# Altium PCB IridiumGpsAntenna.PcbDoc
Units mil, origin at the board's own origin, x right, y up, seen from the top; angles counter-clockwise.
Board outline 2555 x 1275 mil, 2 copper layers (Top Layer, Bottom Layer); 6 components, 11 nets, 41 pads, 340 vias.
Unrouted connection lines stored in the file: 1.
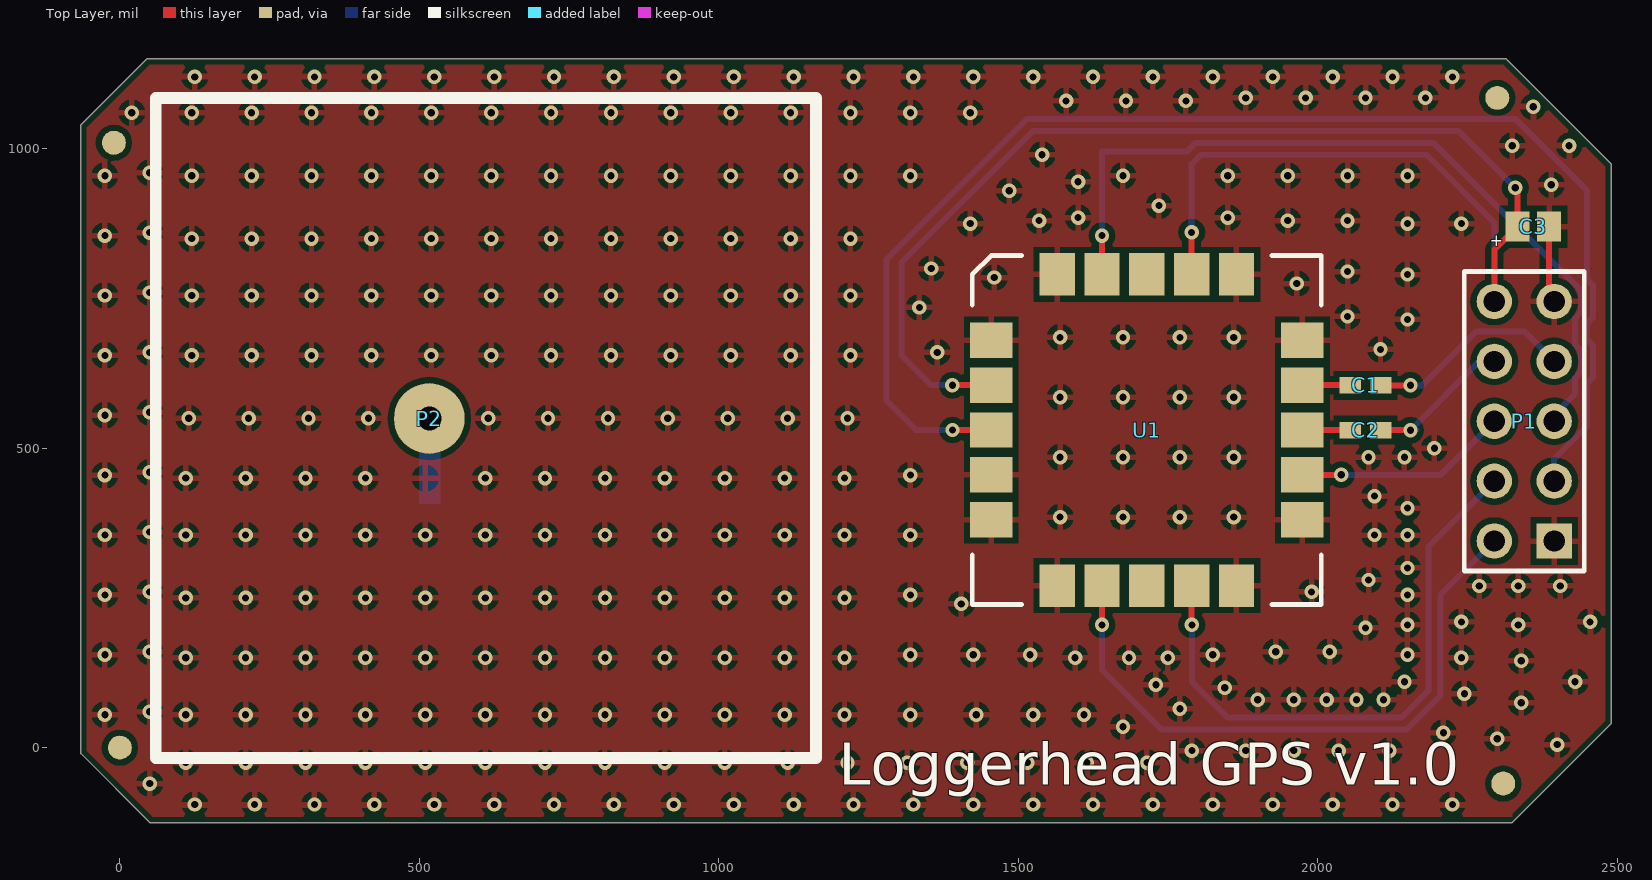
[diagram p0: Top Layer view]
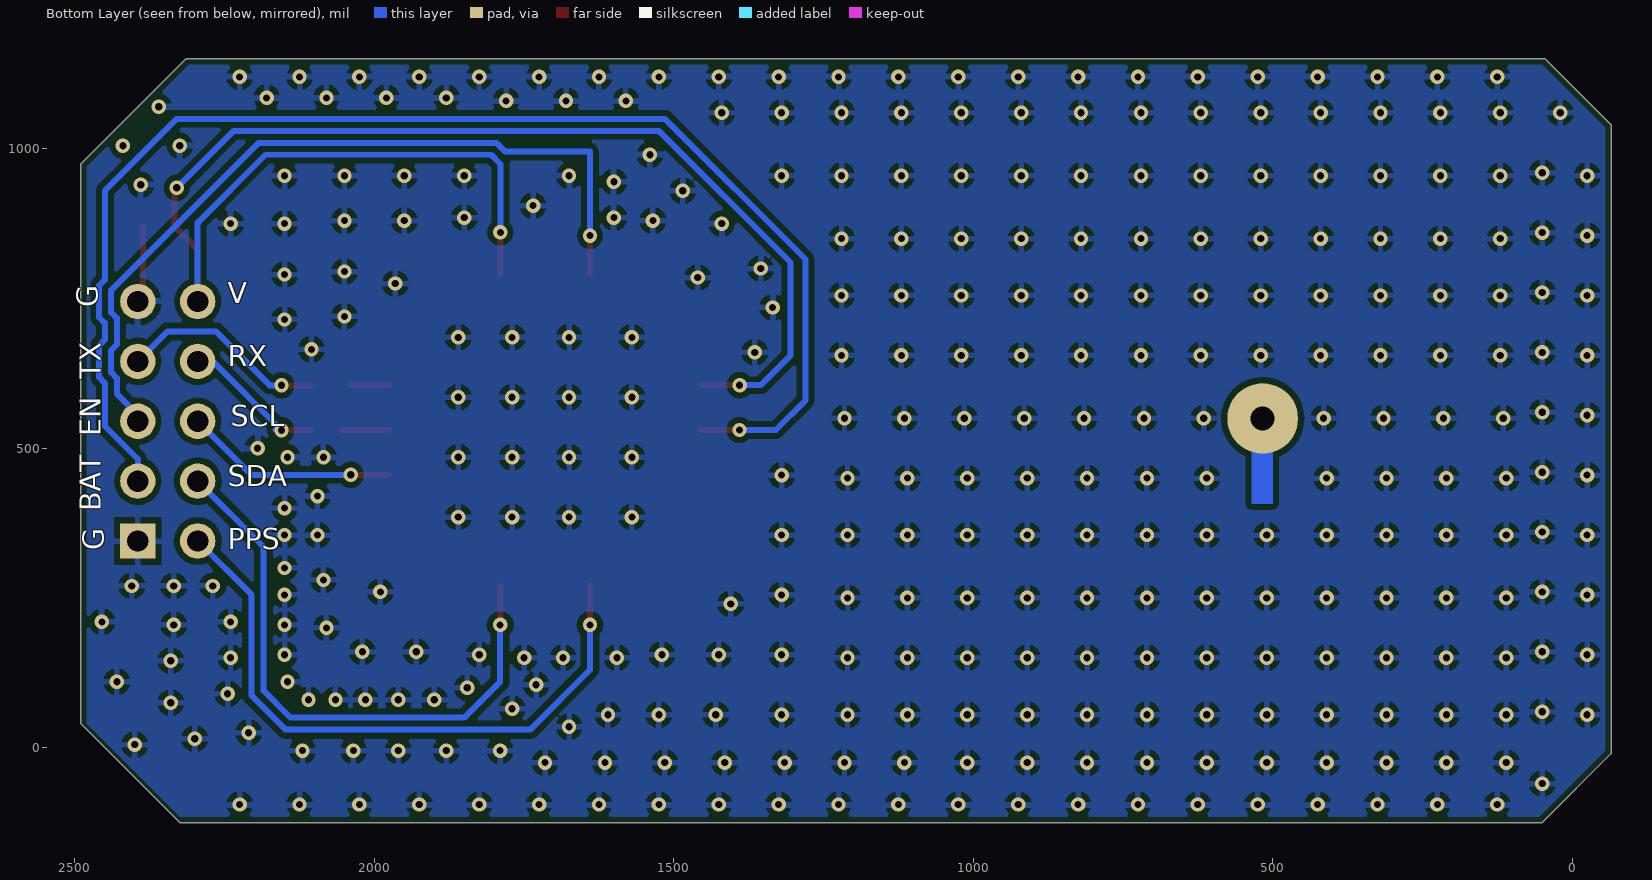
[diagram p1: Bottom Layer view, seen from below]

## Layer stack, top to bottom
Top Solder: solder mask 0.4, Solder Resist, Dk 3.5
Top Layer: signal copper 1.4
Dielectric 1: dielectric 12.6, FR-4, Dk 4.8
Bottom Layer: signal copper 1.4
Bottom Solder: solder mask 0.4, Solder Resist, Dk 3.5

## Board outline
-65,-10 -65,1040 45,1150 2315,1150 2490,975 2490,40 2325,-125 50,-125

## Design rules (kind name [scope] priority, off if disabled: settings)
Clearance [All] p1: gap=10
PolygonConnect [All] p1: connectstyle=Relief reliefconductorwidth=10 reliefentries=4 polygonreliefangle="90 Angle" airgapwidth=10
RoutingVias [All] p1: holewidth=12 width=24 viastyle="Through Hole" minholewidth=12 minwidth=24 maxholewidth=100 maxwidth=100
SolderMaskExpansion [All] p1: expansion=4
Width [All] p1: maxlimit=10 minlimit=10 preferedwidth=10
29 further rules are at their usual default settings.

## Components (designator, comment, footprint, x,y, rotation, side; value= is the part's Value field where it differs from the comment)
C1 "0402 Ferrite" 0402 2080,605 r0 top
C2 "0402 Ferrite" 0402 2080,530 r0 top
C3 "1uF" Tant0805 2360,870 r180 top
P1 "Header 5X2" HDR2X5 2395,345 r90 top
P2 "Iridium" "Iridium Antenna" 60,1085 r0 top
U1 "SAM-M8Q" "GPS SAM-MQ8" 1455,680 r0 top

## Footprints (in the part's own frame and the unit in brackets; to place one, negate y for a bottom-side part, rotate by r counter-clockwise, add the part's x,y. Pads: shape width x height; smd on the part's side, far side on the other; paste and mask are expansions set on the pad)
0402 [mm] "Chip Capacitor; Body 1.0 x 0.5 mm (LxW typ)"
  rect 0.9x0.7 smd: 1(-0.65,0) 2(0.65,0)
"GPS SAM-MQ8" [mm]
  rect 1.8x1.5 smd paste-0.25: 1(0,0) 2(0,-1.9) 3(0,-3.8) 4(0,-5.7) 5(0,-7.6) 11(13.2,-7.6) 12(13.2,-5.7) 13(13.2,-3.8) 14(13.2,-1.9) 15(13.2,0)
  rect 1.5x1.8 smd paste-0.25: 6(2.8,-10.4) 7(4.7,-10.4) 8(6.6,-10.4) 9(8.5,-10.4) 10(10.4,-10.4) 16(10.4,2.8) 17(8.5,2.8) 18(6.6,2.8) 19(4.7,2.8) 20(2.8,2.8)
  silkscreen extent -0.8,-11.2 14,3.6
HDR2X5 [mm] "Connector; Header; 5x2 Position"
  rect 1.5x1.5 hole 0.9: 1(0,0)
  round 1.5 hole 0.9: 2(0,2.54) 3(2.54,0) 4(2.54,2.54) 5(5.08,0) 6(5.08,2.54) 7(7.62,0) 8(7.62,2.54) 9(10.16,0) 10(10.16,2.54)
  silkscreen extent -1.27,-1.27 11.43,3.81
"Iridium Antenna" [mil] "Iridium patch antenna"
  round 118 hole 40 unplated: 0(456.69,-535.43)
  silkscreen extent 0,-1102 1102,0
Tant0805 [mil]
  rect 40x50 smd: 1(-26.5,0) 2(26.5,0)

## Part data
C1 C2: library part C0402, "Ceramic Chip Capacitor - Standard"
C3: library part Tant0805
P1: "Header, 5-Pin, Dual row"
P2: library part "Iridium Antenna"
U1: library part "GPS SAM-M8Q"

## Free pads (board coordinates)
  round 40 smd paste-20 mask+5: 0(-10,1010) 0(0,0) 0(2300,1085) 0(2310,-60)

## Via types
v1: diameter 24, hole 12, Top Layer to Bottom Layer, 340 vias

## Nets (pads, with @x,y where several pads share a name; then routed paths per layer and width w, separated by ;. In a path a pad name is that pad's centre, name@x,y a point inside that pad or via, vN(x,y) a via of type N, cw(c..) or ccw(c..) an arc to the next point about the centre after c; other vN are vias at no path point)
GND: C3.1 P1.1 P1.9 U1.1 U1.4 U1.5 U1.6 U1.10 U1.11 U1.15 U1.16 U1.20 | length 116.5
  Top Layer w10: P1.9@2386.5,753.5 C3.1
  other v1: 125,-95 225,-95 325,-95 425,-95 525,-95 625,-95 725,-95 825,-95 925,-95 1025,-95 1125,-95 1225,-95 1325,-95 1425,-95 1525,-95 1625,-95 1725,-95 1825,-95 1925,-95 2025,-95 2125,-95 2225,-95 50,-60 110,-25 210,-25 310,-25 410,-25 510,-25 610,-25 710,-25 810,-25 910,-25 1010,-25 1115,-25 1215,-25 1315,-25 1415,-25 1515,-25 1615,-25 1715,-25 1790,-5 1880,-5 1960,-5 2035,-5 2120,-5 2400,5 2300,15 2210,25 1675,35 -25,55 110,55 210,55 310,55 410,55 510,55 610,55 710,55 810,55 910,55 1010,55 1110,55 1210,55 1320,55 1430,55 1525,55 1610,55 50,60 1770,65 2340,75 1900,80 1960,80 2015,80 2065,80 2110,80 2245,90 1845,100 1730,105 2145,110 2430,110 2340,145 110,150 210,150 310,150 410,150 510,150 610,150 710,150 810,150 910,150 1010,150 1110,150 1210,150 1595,150 1685,150 1750,150 2240,150 -25,155 1320,155 1425,155 1520,155 1825,155 2150,155 50,160 1930,160 2020,160 2080,200 2150,205 2335,205 2240,210 2455,210 1405,240 110,250 210,250 310,250 410,250 510,250 610,250 710,250 810,250 910,250 1010,250 1110,250 1210,250 -25,255 1320,255 2150,255 50,260 1990,260 2270,270 2335,270 2405,270 2085,280 2150,300 -25,355 110,355 210,355 310,355 410,355 510,355 610,355 710,355 810,355 910,355 1010,355 1110,355 1210,355 1320,355 2095,355 2150,355 50,360 1570,385 1675,385 1770,385 1860,385 2150,400 2095,420 110,450 210,450 310,450 410,450 610,450 710,450 810,450 910,450 1010,450 1110,450 1210,450 -25,455 1320,455 50,460 1570,485 1675,485 1770,485 1860,485 2085,485 2145,485 2195,500 115,550 215,550 315,550 415,550 615,550 715,550 815,550 915,550 1015,550 1115,550 1215,550 -25,555 50,560 1570,585 1675,585 1770,585 1860,585 -25,655 120,655 220,655 320,655 420,655 520,655 620,655 720,655 820,655 920,655 1020,655 1120,655 1220,655 50,660 1365,660 2105,665 1570,685 1675,685 1770,685 1860,685 2150,715 2050,720 1335,735 -25,755 120,755 220,755 320,755 420,755 520,755 620,755 720,755 820,755 920,755 1020,755 1120,755 1220,755 50,760 1965,775 1460,785 2150,790 2050,795 1355,800 120,850 220,850 320,850 420,850 520,850 620,850 720,850 820,850 920,850 1020,850 1120,850 1220,850 -25,855 50,860 1420,875 2150,875 2240,875 1535,880 1950,880 2050,880 1600,885 1850,885 1735,905 1485,930 2390,940 1600,945 -25,955 120,955 220,955 320,955 420,955 520,955 620,955 720,955 820,955 920,955 1020,955 1120,955 1220,955 1320,955 1675,955 1850,955 1950,955 2050,955 2150,955 50,960 1540,990 2325,1005 2420,1005 20,1060 120,1060 220,1060 320,1060 420,1060 520,1060 620,1060 720,1060 820,1060 920,1060 1020,1060 1120,1060 1220,1060 1320,1060 1420,1060 2360,1070 1580,1080 1680,1080 1780,1080 1880,1085 1980,1085 2080,1085 2180,1085 125,1120 225,1120 325,1120 425,1120 525,1120 625,1120 725,1120 825,1120 925,1120 1025,1120 1125,1120 1225,1120 1325,1120 1425,1120 1525,1120 1625,1120 1725,1120 1825,1120 1925,1120 2025,1120 2125,1120 2225,1120
GPSBAT: P1.3 U1.3 | length 2271.2
  Top Layer w10: v1(1390.39,530.39) U1.3
  Bottom Layer w10: v1(1390.39,530.39) 1329.61,530.39 1280,580 1280,815 1515,1050 2330,1050 2450,930 2450,781.26 2459.53,771.73 2459.53,718.27 2450,708.74 2450,681.26 2459.53,671.73 2459.53,618.27 2450,608.74 2450,537.03 2395,482.03 P1.3
GPSEN: P1.5 U1.19 | length 1357.4
  Top Layer w10: U1.19 v1(1640.04,854.96)
  Bottom Layer w10: v1(1640.04,854.96) 1640.04,995.04 1781.76,995.04 1796.72,1010 2192.97,1010 2439.53,763.44 2439.53,726.56 2430,717.03 2430,672.97 2439.53,663.44 2439.53,626.56 2430,617.03 2430,590.94 2395,555.94 P1.5
NetC1_1: C1.1 U1.14 | length 65.3
  Top Layer w10: U1.14 C1.1@2040,605.2
NetC2_1: C2.1 U1.13 | length 79.7
  Top Layer w10: U1.13 C2.1@2054.41,530.39
PPS: P1.2 U1.7 | length 1066
  Top Layer w10: v1(1640,205) U1.7
  Bottom Layer w10: v1(1640,205) 1640,130 1740,30 2148.28,30 2205,86.72 2205,255 P1.2
RXD: C2.2 P1.8 | length 247
  Top Layer w10: C2.2 v1(2155,530)
  Bottom Layer w10: v1@2165,530 v1(2155,530) 2270,645 P1.8
SCL: P1.6 U1.12 | length 357.3
  Top Layer w10: U1.12 v1(2039.41,455.59)
  Bottom Layer w10: v1(2039.41,455.59) 2205.59,455.59 P1.6
SDA: P1.4 U1.9 | length 994.3
  Top Layer w10: v1@1789.65,205.35 U1.9
  Bottom Layer w10: v1(1790,205) 1790,110 1850,50 2140,50 2185,95 2185,335 P1.4
TXD: C1.2 P1.7 | length 347.4
  Top Layer w10: C1.2 v1(2155,605)
  Bottom Layer w10: v1(2155,605) 2175,605 2265,695 2345,695 P1.7
VCC: C3.2 P1.10 U1.2 U1.17 | length 2558.3
  Top Layer w10: v1(1390.2,605.2) U1.2 ; U1.17 v1(1789.65,860.35) ; P1.10 2295,831.5 C3.2 v1@2333.5,931.5
  Bottom Layer w10: v1(1390.2,605.2) 1354.8,605.2 1305,655 1305,810 1525,1030 2235,1030 v1(2330,935) ; v1(1789.65,860.35) 1789.65,974.65 1805,990 2181.72,990 2295,876.72 P1.10
pads on no net: P2.0 U1.8 U1.18

## Polygon pours and split planes (outlines as drawn)
GND on Top Layer "GND" (solid, pour order 4): -55,1035 50,1140 2310,1140 2480,970 2480,45 2325,-110 2325,-115 55,-115 -55,-5 -55,0
GND on Bottom Layer "GND" (solid, pour order 6): -55,1035 50,1140 2310,1140 2480,970 2480,45 2480,40 2325,-115 55,-115 -55,-5

## Other copper
Bottom Layer:
  region net GND: 500,512.5 535,512.5 535,407.5 500,407.5

## Silkscreen, mask and mechanical layers (free items; w line width, h text height)
Top Overlay:
  text "Loggerhead GPS v1.0" at 1200,-85 h120
Bottom Overlay:
  text "G" at 2450,735 h60 r270
  text "V" at 2245,730 h60
  text "RX" at 2245,625 h60
  text "TX" at 2445,615 h60 r270
  text "SCL" at 2240,525 h60
  text "EN" at 2445,520 h60 r270
  text "SDA" at 2245,425 h60
  text "BAT" at 2445,395 h60 r270
  text "G" at 2440,330 h60 r270
  text "PPS" at 2245,320 h60
Mechanical 1:
  lines w10: -65,-10 -65,1040 45,1150 2310,1150 2315,1150 2490,975 2490,40 2325,-125 50,-125 -65,-10

## Text inside footprints (layer, text, board x,y; h text height)
C3: Top Overlay "+" at 2310,855 h19.68 r180